# EAGLE board rev_p.2-v19 (EAGLE 9.7.0), part 1 of 3
REV: P
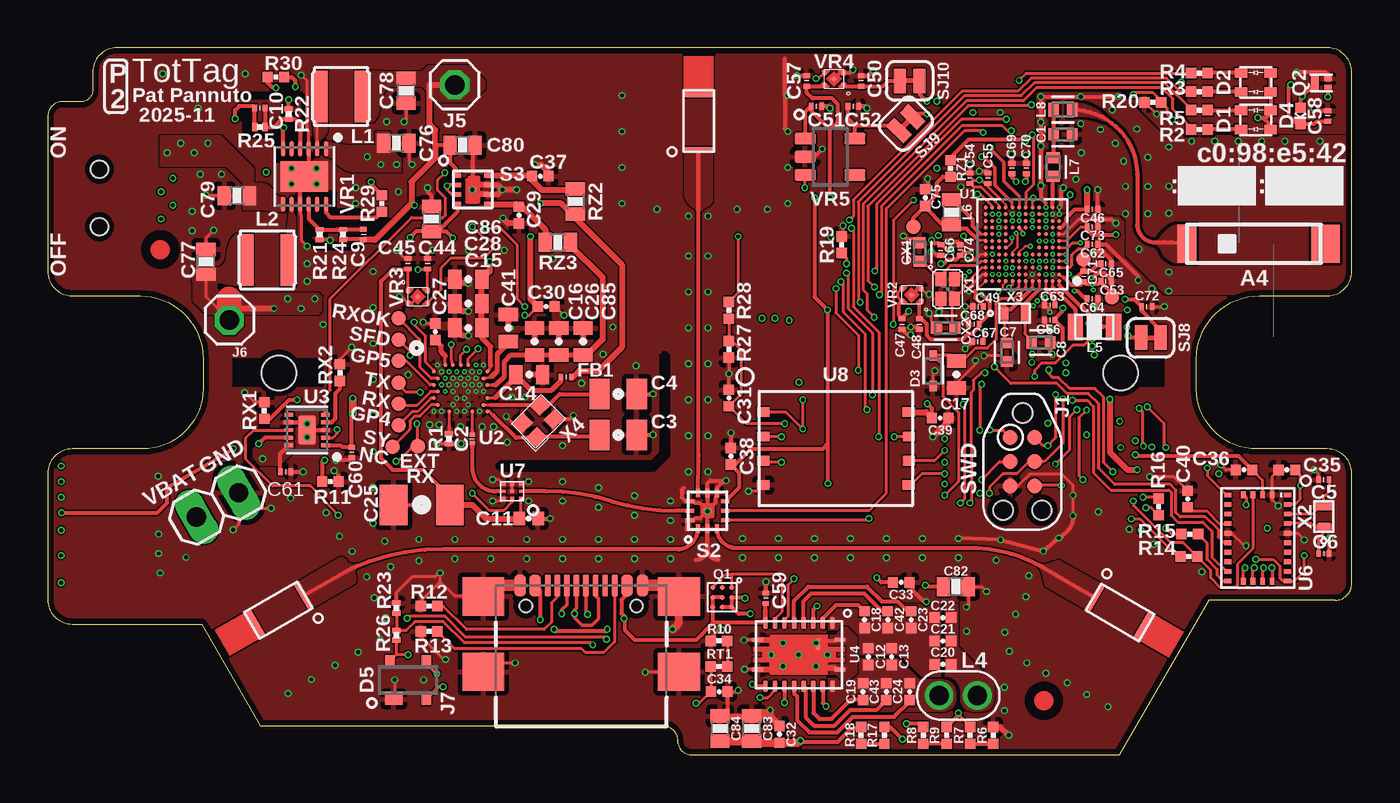
[diagram p0: board, top side]
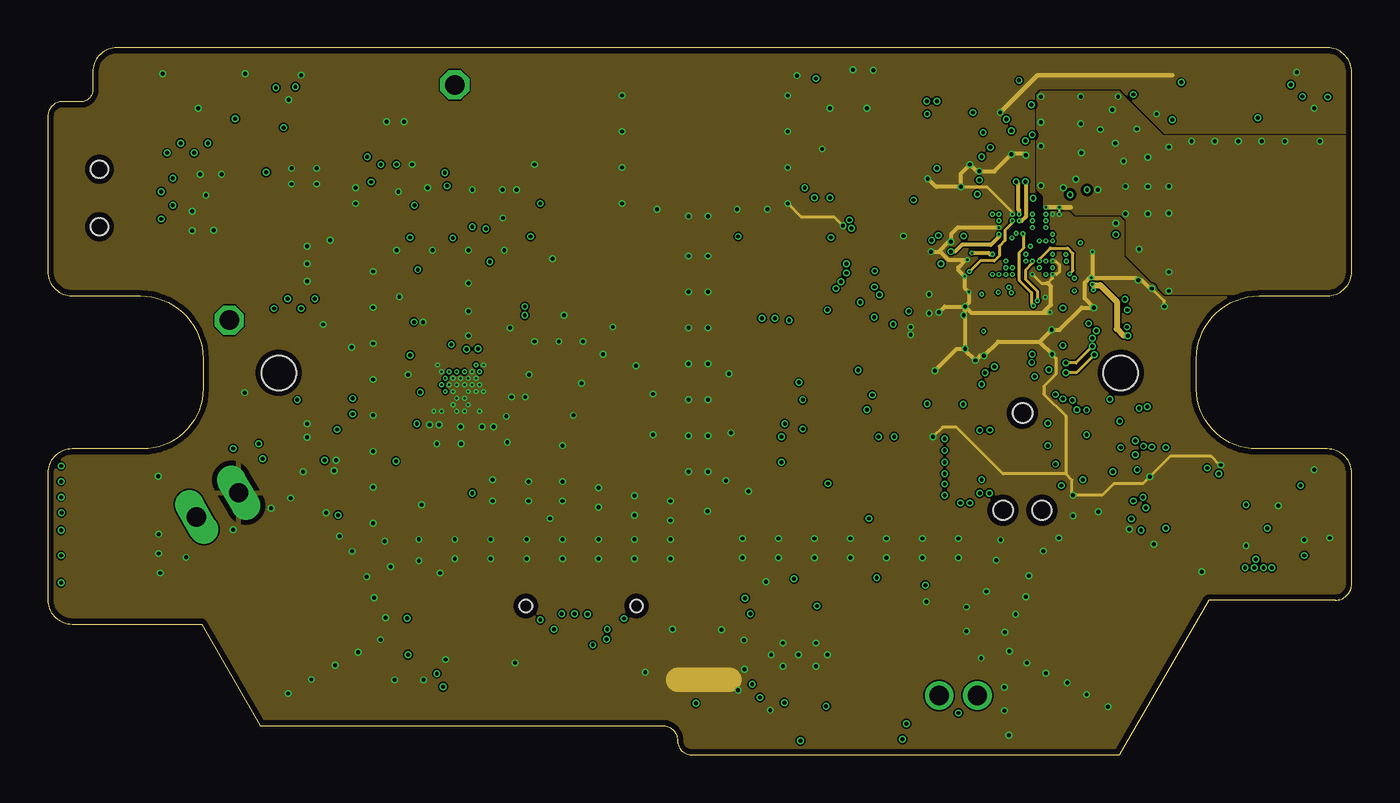
[diagram p1: board, inner layer Route2]
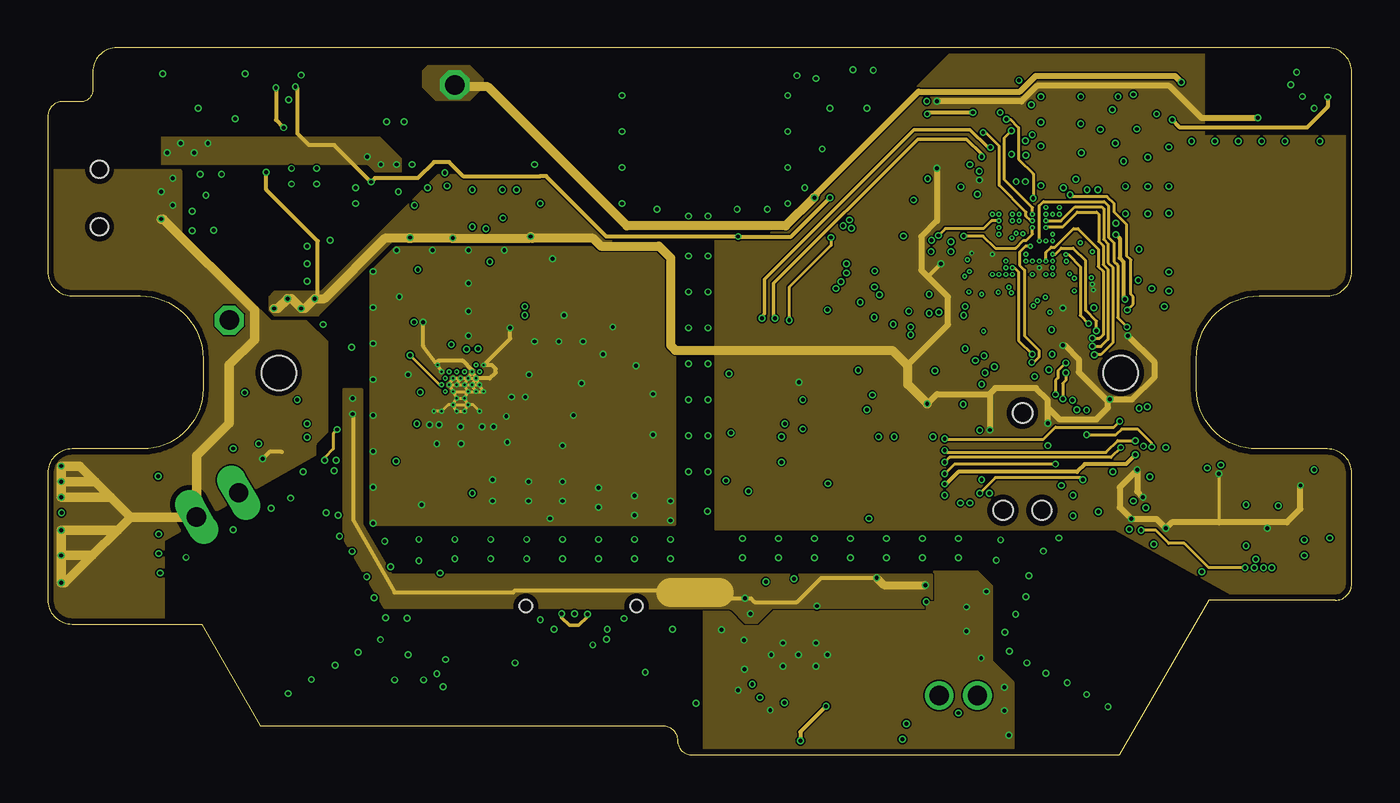
[diagram p2: board, inner layer Route15]
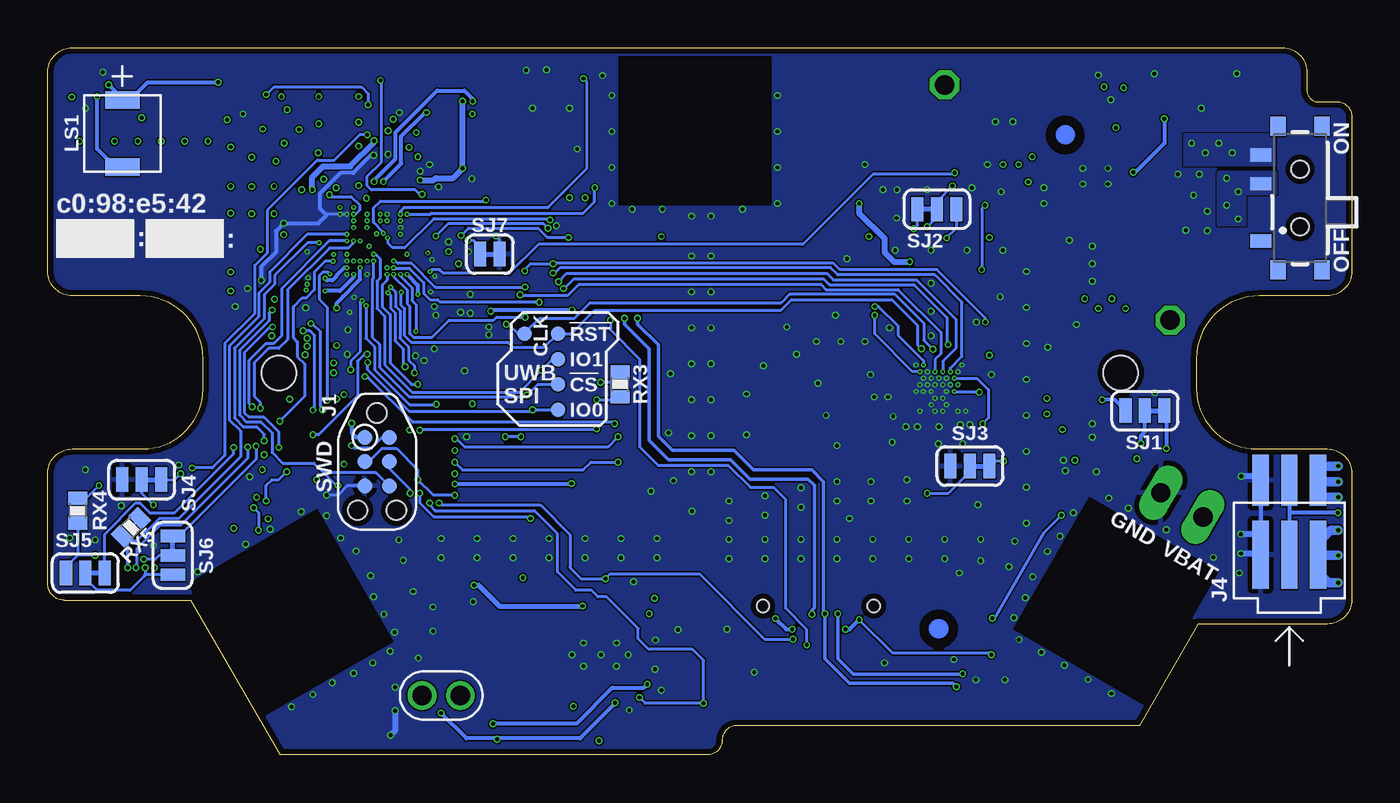
[diagram p3: board, bottom side, seen from below]

Size 68.14 x 36.93 mm. Coordinates in mm from the lower left corner, seen from the top.
Outline: 66.87,36.93 3.61,36.93 arc90 2.34,35.66 2.34,34.7 arc-90 1.76,34.12 0.76,34.12 arc90 0,33.36 0,25.25 arc90 1.27,23.98 4.83,23.98 arc-90 8.11,20.69 8.11,19.14 arc-90 4.95,15.98 1.27,15.98 arc90 0,14.71 0,8.1 arc90 1.27,6.83 8.03,6.83 11.11,1.52 32.14,1.52 arc-90 32.9,0.76 arc90 33.66,0 55.99,0 60.66,8.08 67.29,8.08 arc90 68.14,8.92 68.14,14.71 arc90 66.87,15.98 63.18,15.98 arc-90 60.02,19.14 60.02,20.69 arc-90 63.31,23.98 66.87,23.98 arc90 68.14,25.25 68.14,35.66 arc90 66.87,36.93
Copper layers (1+2*15+16): Top 0.035mm / dielectric 1.5mm / Route2 0.035mm / dielectric 0.15mm / Route15 0.035mm / dielectric 0.2mm / Bottom 0.035mm
Design rules "drc *": minimum track width 6mil, minimum drill 4mil, track to track 3mil, track to pad 3mil, pad to pad 4mil, via to via 3mil, smd to smd 4mil, copper to edge 12mil, drill to drill 6mil, minimum pad ring 8mil, minimum via ring 3mil, stop-mask expansion 1mil, vias tented up to drill 12mil, thermal gap 10mil
Net classes: 1 BLE_RF: width 0.22 mm, clearance 0.15 mm; 2 UWB_RF: width 0.22 mm, clearance 0.15 mm; 3 USB_PHY: width 0.152 mm, clearance 0.305 mm; 4 UWB_XTAL: width 0.22 mm, clearance 0.15 mm
Holes 1.8 mm at 12.07,19.95 56.07,19.95
tKeepout: area 18.1,9.6 to 32.3,11.7; area 34.3,9.6 to 48.8,11.7; area 33.1,12.4 to 35.1,27.8
tRestrict: area 9.7,19.3 to 14.4,20.7; area 53.8,19.3 to 58.3,20.7; area 13.4,26.4 to 16.5,29.4; area 10,31 to 13.5,34.6; area 21.2,16.9 to 21.3,17.4; area 21.9,16.9 to 22,17.4; area 23.5,14.9 to 32.5,21

## Footprints (pad centres in the part's own frame; a part is rotated, then mirrored left to right if it is on the bottom)
ACR0301U = smd 1.57 x 0.3: FEED 3.685,2.89; STRUCT-NC 3.685,5.79
AMCA72-2R470G-S1F-T = smd 2 x 1.5: NC 0,3.75 | smd 2 x 1: S1 0,-3.5
CAPC1005X60 = smd 0.56 x 0.629: 1 -0.485,0; 2 0.485,0
0201_CAP = smd 0.3 x 0.21: P$1 0,0.22; P$2 0,-0.22
SMD_2012M-0805US-C = smd 1.05 x 1.6: P$1 -0.975,0; P$2 0.975,0
0201_CAP' = smd 0.25 x 0.35: P$1 -0.275,0; P$2 0.275,0
SMD_1005M-0402US-C = smd 0.6 x 0.7: P$1 -0.5,0; P$2 0.5,0
0402_CAP = smd 0.536 x 0.546: 1 -0.433,0; 2 0.433,0
SMD_1608M-0603US-C = smd 0.7 x 1: P$1 -0.7,0; P$2 0.7,0
SMD_3216M-1206US-C = smd 1.45 x 2.1: P$1 -1.475,0; P$2 1.475,0
0603_CAP = smd 0.7 x 1: 1 -0.65,0; 2 0.65,0
LED-0606 = smd 0.65 x 0.5: A1 0.775,0.5; A2 0.775,-0.5; C1 -0.775,0.5; C2 -0.775,-0.5
SODFL1608X70 = smd 0.538 x 0.4: 1 -0.796,0; 2 0.796,0
0402_DIODE = smd 0.536 x 0.546: ANODE -0.433,0; CATHODE 0.433,0
SOT143B = smd 0.9 x 0.6: 1 -0.75,-1 | smd 0.5 x 0.6: 2 0.95,-1; 3 0.95,1; 4 -0.95,1
0201_FB = smd 0.25 x 0.35: P$1 -0.275,0; P$2 0.275,0
TC2030-IDC-NL-2SIDE = smd 0.787 x 0.787: 1 -1.27,-0.635; 2 -1.27,0.635; 3 0,-0.635; 4 0,0.635; 5 1.27,-0.635; 6 1.27,0.635 | smd 0.787 x 0.787 bottom: B1 -1.27,0.635; B2 -1.27,-0.635; B3 0,0.635; B4 0,-0.635; B5 1.27,0.635; B6 1.27,-0.635 | hole 1.016: -2.54,0; 2.54,1.016; 2.54,-1.016
1X02 = drill 1.016 long: 1 -1.27,0; 2 1.27,0
MOLEX-PICO-SPOX-3_SIDE = smd 3.55 x 0.85: 1 -1.725,1.5; 2 -1.725,0; 3 -1.725,-1.5 | smd 2.65 x 0.85: 1SUPP 2.175,1.5; 2SUPP 2.175,0; 3SUPP 2.175,-1.5
1X01 = drill 1.016 octagon: 1 0,0
GCT_USB4110-GF-A = smd 0.6 x 1.15: A1/B12 -3.2,1.075; A4/B9 -2.4,1.075; B1/A12 3.2,1.075; B4/A9 2.4,1.075 | smd 0.3 x 1.15: A5 -1.25,1.075; A6 -0.25,1.075; A7 0.25,1.075; A8 1.25,1.075; B5 1.75,1.075; B6 0.75,1.075; B7 -0.75,1.075; B8 -1.75,1.075 | smd 2.18 x 2: S1 -5.11,0.5; S2 5.11,0.5; S3 -5.11,-3.43; S4 5.11,-3.43 | hole 0.65: -2.89,0; 2.89,0
NRX3015 = smd 0.8 x 2.7: P$1 -1.1,0; P$2 1.1,0
WURTH_COIL_760308103204 = drill 1: P$1 0,1; P$2 0,-1
0805_CAP = smd 0.8 x 1.4: P$1 1,0; P$2 -1,0
INDC1006X60N = smd 0.56 x 0.729: 1 -0.485,0; 2 0.485,0
SMT-0440-T-2-R = smd 0.9 x 1.8: + 1.75,0; - -1.75,0
DSBGA = smd 0.25 x 0.25: A1 -0.5,0.5; A2 0,0.5; A3 0.5,0.5; B1 -0.5,0; B2 0,0; B3 0.5,0; C1 -0.5,-0.5; C2 0,-0.5; C3 0.5,-0.5
XFDFN-3 = smd 0.4 x 0.7: D 0.35,0 | smd 0.4 x 0.25: G -0.35,0.215; S -0.35,-0.215
0201_RES = smd 0.28 x 0.43: 1 -0.255,0; 2 0.255,0
0402_RES = smd 0.536 x 0.546: 1 -0.433,0; 2 0.433,0
0603-RES = smd 0.7 x 1: 1 -0.65,0; 2 0.65,0
450404015514 = smd 0.7 x 1.1: 1 2.25,-2.05; 2 -0.75,-2.05; 3 -2.25,-2.05 | smd 1 x 0.8: Z1 -3.75,1.15; Z2 3.75,1.15; Z3 3.75,-1.15; Z4 -3.75,-1.15 | hole 0.9: -1.5,0; 1.5,0
SKY13373 = smd 0.44 x 0.2: 1 -0.93,0.5; 2 -0.93,0; 3 -0.93,-0.5; 7 0.93,-0.5; 8 0.93,0; 9 0.93,0.5 | smd 0.2 x 0.44: 4 -0.5,-0.93; 5 0,-0.93; 6 0.5,-0.93; 10 0.5,0.93; 11 0,0.93; 12 -0.5,0.93; PAD 0,0
TDFN2X2X0P6-8 = smd 0.4 x 0.24: 1 -0.8,0.75; 2 -0.8,0.25; 3 -0.8,-0.25; 4 -0.8,-0.75; 5 0.8,-0.75; 6 0.8,-0.25; 7 0.8,0.25; 8 0.8,0.75; PAD 0,0
SMT-JUMPER_3_1-NC_TRACE_SILK = smd 0.635 x 1.27: 1 -1.016,0; 2 0,0; 3 1.016,0
SMT-JUMPER_2_NC_TRACE_SILK = smd 0.635 x 1.27: 1 -0.508,0; 2 0.508,0
PAD.03X.03 = smd 0.762 x 0.762: P$1 0,0
APOLLO4_BLUE_SOC_BGA = smd 0.2 x 0.2: A1 -1.925,1.925; A2 -1.575,1.925; A3 -1.225,1.925; A4 -0.875,1.925; A5 -0.525,1.925; A6 -0.175,1.925; A7 0.175,1.925; A8 0.525,1.925; A9 0.875,1.925; A10 1.225,1.925; A11 1.575,1.925; A12 1.925,1.925; B1 -1.925,1.575; B2 -1.575,1.575; B3 -1.225,1.575; B4 -0.875,1.575; B5 -0.525,1.575; B6 -0.175,1.575; B7 0.175,1.575; B8 0.525,1.575; B9 0.875,1.575; B10 1.225,1.575; B11 1.575,1.575; B12 1.925,1.575; C1 -1.925,1.225; C2 -1.575,1.225; C3 -1.225,1.225; C4 -0.875,1.225; C5 -0.525,1.225; C6 -0.175,1.225; C7 0.175,1.225; C8 0.525,1.225; C9 0.875,1.225; C10 1.225,1.225; C11 1.575,1.225; C12 1.925,1.225; D1 -1.925,0.875; D2 -1.575,0.875; D3 -1.225,0.875; D4 -0.875,0.875; D5 -0.525,0.875; D6 -0.175,0.875; D7 0.175,0.875; D8 0.525,0.875; D9 0.875,0.875; D10 1.225,0.875; D11 1.575,0.875; D12 1.925,0.875; E1 -1.925,0.525; E2 -1.575,0.525; E3 -1.225,0.525; E4 -0.875,0.525; E5 -0.525,0.525; E6 -0.175,0.525; E7 0.175,0.525; E8 0.525,0.525; E9 0.875,0.525; E10 1.225,0.525; E11 1.575,0.525; E12 1.925,0.525; F1 -1.925,0.175; F2 -1.575,0.175; F3 -1.225,0.175; F4 -0.875,0.175; F9 0.875,0.175; F10 1.225,0.175; F11 1.575,0.175; F12 1.925,0.175; G1 -1.925,-0.175; G2 -1.575,-0.175; G3 -1.225,-0.175; G4 -0.875,-0.175; G9 0.875,-0.175; G10 1.225,-0.175; G11 1.575,-0.175; G12 1.925,-0.175; H1 -1.925,-0.525; H2 -1.575,-0.525; H3 -1.225,-0.525; H4 -0.875,-0.525; H9 0.875,-0.525; H10 1.225,-0.525; H11 1.575,-0.525; H12 1.925,-0.525; J1 -1.925,-0.875; J2 -1.575,-0.875; J3 -1.225,-0.875; J4 -0.875,-0.875; J5 -0.525,-0.875; J6 -0.175,-0.875; J7 0.175,-0.875; J8 0.525,-0.875; J9 0.875,-0.875; J10 1.225,-0.875; J11 1.575,-0.875; J12 1.925,-0.875; K1 -1.925,-1.225; K2 -1.575,-1.225; K3 -1.225,-1.225; K4 -0.875,-1.225; K5 -0.525,-1.225; K6 -0.175,-1.225; K7 0.175,-1.225; K8 0.525,-1.225; K9 0.875,-1.225; K10 1.225,-1.225; K11 1.575,-1.225; K12 1.925,-1.225; L1 -1.925,-1.575; L2 -1.575,-1.575; L4 -0.875,-1.575; L5 -0.525,-1.575; L6 -0.175,-1.575; L7 0.175,-1.575; L8 0.525,-1.575; L9 0.875,-1.575; L10 1.225,-1.575; L11 1.575,-1.575; L12 1.925,-1.575; M1 -1.925,-1.925; M2 -1.575,-1.925; M3 -1.225,-1.925; M4 -0.875,-1.925; M5 -0.525,-1.925; M6 -0.175,-1.925; M7 0.175,-1.925; M8 0.525,-1.925; M9 0.875,-1.925; M10 1.225,-1.925; M11 1.575,-1.925; M12 1.925,-1.925
WLCSP52 = smd 0.216 x 0.216: A2 -1.2,1.211; A4 -0.8,1.211; A6 -0.4,1.211; A8 0,1.211; A10 0.4,1.211; A12 0.8,1.211; A14 1.2,1.211; B1 -1.4,0.865; B3 -1,0.865; B5 -0.6,0.865; B7 -0.2,0.865; B9 0.2,0.865; B11 0.6,0.865; B13 1,0.865; B15 1.4,0.865; C2 -1.2,0.519; C4 -0.8,0.519; C6 -0.4,0.519; C8 0,0.519; C10 0.4,0.519; C12 0.8,0.519; C14 1.2,0.519; D1 -1.4,0.173; D3 -1,0.173; D5 -0.6,0.173; D7 -0.2,0.173; D9 0.2,0.173; D11 0.6,0.173; D13 1,0.173; D15 1.4,0.173; E2 -1.2,-0.173; E4 -0.8,-0.173; E6 -0.4,-0.173; E10 0.4,-0.173; E12 0.8,-0.173; E14 1.2,-0.173; F1 -1.4,-0.519; F7 -0.2,-0.519; F9 0.2,-0.519; F15 1.4,-0.519; G2 -1.2,-0.865; G6 -0.4,-0.865; G10 0.4,-0.865; G14 1.2,-0.865; H1 -1.4,-1.211; H3 -1,-1.211; H5 -0.6,-1.211; H7 -0.2,-1.211; H9 0.2,-1.211; H11 0.6,-1.211; H13 1,-1.211; H15 1.4,-1.211
DSQ0010A = smd 0.5 x 0.2: 1 -0.95,0.8; 2 -0.95,0.4; 3 -0.95,0; 4 -0.95,-0.4; 5 -0.95,-0.8; 6 0.95,-0.8; 7 0.95,-0.4; 8 0.95,0; 9 0.95,0.4; 10 0.95,0.8 | smd 0.9 x 1.5: PAD 0,0
RHL0020A = smd 0.24 x 0.6: 1 -0.775,2.15; 10 -0.775,-2.15; 11 0.775,-2.15; 20 0.775,2.15 | smd 0.6 x 0.24: 2 -1.65,1.75; 3 -1.65,1.25; 4 -1.65,0.75; 5 -1.65,0.25; 6 -1.65,-0.25; 7 -1.65,-0.75; 8 -1.65,-1.25; 9 -1.65,-1.75; 12 1.65,-1.75; 13 1.65,-1.25; 14 1.65,-0.75; 15 1.65,-0.25; 16 1.65,0.25; 17 1.65,0.75; 18 1.65,1.25; 19 1.65,1.75; PAD -0.55,1
LGA28R0P510X4_5P2X3P8X1 = smd 0.25 x 0.375: 1 -2.25,1.562; 6 -2.25,-1.562; 7 -1.75,-1.562; 8 -1.25,-1.562; 9 -0.75,-1.562; 10 -0.25,-1.562; 11 0.25,-1.562; 12 0.75,-1.562; 13 1.25,-1.562; 14 1.75,-1.562; 15 2.25,-1.562; 20 2.25,1.562; 21 1.75,1.562; 22 1.25,1.562; 23 0.75,1.562; 24 0.25,1.562; 25 -0.25,1.562; 26 -0.75,1.562; 27 -1.25,1.562; 28 -1.75,1.562 | smd 0.375 x 0.25: 2 -2.263,0.75; 3 -2.263,0.25; 4 -2.263,-0.25; 5 -2.263,-0.75; 16 2.263,-0.75; 17 2.263,-0.25; 18 2.263,0.25; 19 2.263,0.75
QM14068 = smd 0.2 x 0.17: 1 -0.45,0.365; 2 -0.45,0; 3 -0.45,-0.365; 4 0,-0.365; 5 0.45,-0.365; 6 0.45,0; 7 0.45,0.365; 8 0,0.365; 9 0,0
AS5FXXXXXXXX-XXLXN = smd 0.65 x 0.5: 1 -3.8,1.9; 2 -3.8,0.63; 3 -3.8,-0.64; 4 -3.8,-1.9; 5 3.8,-1.9; 6 3.82,-0.64; 7 3.82,0.63; 8 3.8,1.9
SON45P300X300X80-13T160X250N = smd 0.813 x 0.224: 1 -1.445,1.125; 2 -1.445,0.675; 3 -1.445,0.225; 4 -1.445,-0.225; 5 -1.445,-0.675; 6 -1.445,-1.125; 7 1.445,-1.125; 8 1.445,-0.675; 9 1.445,-0.225; 10 1.445,0.225; 11 1.445,0.675; 12 1.445,1.125 | smd 1.6 x 2.5: 13 0,0
4-XDFN-EP = smd 0.21 x 0.21: 1 -0.505,0.325; 2 -0.505,-0.325; 3 0.505,-0.325; 4 0.505,0.325 | smd 0.2 x 0.2 rotated 45: PAD 0,0
DBV0005A--SOT23-5-VARIANT = smd 1.1 x 0.6: 1 -1.3,0.95; 2 -1.3,0; 3 -1.3,-0.95; 4 1.3,-0.95; 5 1.3,0.95
ABM12W = smd 0.73 x 0.58: 1 -0.5,-0.35; 2 0.5,-0.35; 3 0.5,0.35; 4 -0.5,0.35
TXC-9HT12 = smd 0.4 x 0.6: 1 -0.53,0 | smd 0.4 x 0.86: 2 0.53,0
TXC-8Y = smd 0.8 x 0.7: 1 -0.65,-0.5; 2 0.65,-0.5; 3 0.65,0.5; 4 -0.65,0.5

## Placement (x,y rotation side)
A1  ACR0301U  [ACR0301U]  30.32,28.71 0 top
A2  ACR0301U  [ACR0301U]  54.07,12.84 240 top
A3  ACR0301U  [ACR0301U]  17.71,6.55 120 top
A4  AMCA72-2R47G-S1F-T  [AMCA72-2R470G-S1F-T]  63.02,26.7 270 top
C1  1.5pF  [CAPC1005X60]  53.04,32.41 0 top
C2  2pF  [0201_CAP]  22.18,16.51 0 top
C3  3.3pF  [SMD_2012M-0805US-C]  29.8,16.71 0 top
C4  3.3pF  [SMD_2012M-0805US-C]  29.8,18.85 0 top
C5  4pF  [0201_CAP']  66.68,14.38 0 top
C6  4pF  [0201_CAP']  66.68,10.52 180 top
C7  6pF  [CAPC1005X60]  50.12,21.03 270 top
C8  6pF  [CAPC1005X60]  51.9,21.54 0 top
C9  22pF  [0201_CAP']  16.49,27.18 90 top
C10  22pF  [0201_CAP']  11.08,33.78 180 top
C11  100pF  [SMD_1005M-0402US-C]  25.13,12.34 0 top
C12  470pF  [0402_CAP]  42.88,5.13 270 top
C13  470pF  [0402_CAP]  44.1,5.13 270 top
C14  4.7nF  [SMD_1608M-0603US-C]  25.15,19.86 0 top
C15  4.7nF  [SMD_1608M-0603US-C]  21.98,22.3 180 top
C16  4.7nF  [SMD_1608M-0603US-C]  25.43,21.59 270 top
C17  4.7nF  [SMD_1608M-0603US-C]  47.48,19.86 90 top
C18  10nF  [0402_CAP]  42.68,7.06 270 top
C19  10nF  [0402_CAP]  42.6,3.3 90 top
C20  22nF  [0402_CAP]  46.77,4.72 0 top
C21  22nF  [0402_CAP]  46.77,5.94 0 top
C22  22nF  [0402_CAP]  46.77,7.16 0 top
C23  22nF  [0402_CAP]  45.12,7.06 270 top
C24  22nF  [0402_CAP]  45.04,3.3 90 top
C25  0.1uF  [SMD_3216M-1206US-C]  19.54,13.06 180 top
C26  0.1uF  [SMD_1608M-0603US-C]  26.7,21.59 270 top
C27  0.1uF  [0402_CAP]  20.25,22.1 90 top
C28  0.1uF  [SMD_1608M-0603US-C]  21.98,23.57 180 top
C29  0.1uF  [0402_CAP]  24.62,28.19 270 top
C30  0.1uF  [0402_CAP]  26.04,23.42 0 top
C31  0.1uF  [0402_CAP]  35.59,18.64 90 top
C32  0.1uF  [0402_CAP]  38.23,1.07 90 top
C33  0.1uF  [0402_CAP]  44.59,9.01 0 top
C34  0.1uF  [0402_CAP]  35.08,3.3 0 top
C35  0.1uF  [0402_CAP]  64.75,14.88 180 top
C36  0.1uF  [0402_CAP]  62.52,14.88 180 top
C37  0.1uF  [0402_CAP]  25.74,30.23 0 top
C38  0.1uF  [0402_CAP]  35.69,15.6 90 top
C39  0.1uF  [0402_CAP]  46.64,17.59 0 top
C40  0.1uF  [0402_CAP]  59.57,13.36 90 top
C41  0.22uF  [SMD_1608M-0603US-C]  24.06,22.3 270 top
C42  0.47uF  [0402_CAP]  43.9,7.06 270 top
C43  0.47uF  [0402_CAP]  43.82,3.3 90 top
C44  1uF  [0201_CAP']  19.84,25.65 90 top
C45  1uF  [0201_CAP']  18.83,25.65 90 top
C46  1uF  [0201_CAP']  54.59,28.5 0 top
C47  1uF  [0201_CAP']  44.63,22.5 270 top
C48  1uF  [0201_CAP']  45.55,22.5 270 top
C49  1uF  [0201_CAP']  48.62,23.42 0 top
C50  1uF  [0201_CAP']  42.5,35.2 90 top
C51  1uF  [0201_CAP']  40.16,33.88 0 top
C52  1uF  [0201_CAP']  42.09,33.88 0 top
C53  1uF  [0201_CAP']  55.3,24.74 0 top
C54  1uF  [0201_CAP']  48.19,30.12 90 top
C55  1uF  [0201_CAP']  49.13,30.12 90 top
C56  1uF  [0201_CAP']  52.36,22.71 180 top
C57  1uF  [0201_CAP']  39.66,35.2 90 top
C58  1uF  [0201_CAP']  66.88,33.38 90 top
C59  1uF  [0201_CAP']  37.52,8.18 90 top
C60  1uF  [0201_CAP']  15.88,15.8 90 top
C61  1uF  [0201_CAP']  12.43,14.78 180 top
C62  2.2uF  [0201_CAP']  54.59,26.67 0 top
C63  2.2uF  [0201_CAP']  52.36,23.49 180 top
C64  2.2uF  [0201_CAP']  54.59,23.83 0 top
C65  2.2uF  [0201_CAP']  55.3,25.65 0 top
C66  2.2uF  [0201_CAP']  46.67,26.37 270 top
C67  2.2uF  [0201_CAP']  48.6,21.59 0 top
C68  2.2uF  [0201_CAP']  48.39,22.5 180 top
C69  2.2uF  [0201_CAP']  50.37,30.63 90 top
C70  2.2uF  [0201_CAP']  51.14,30.63 90 top
C71  2.2uF  [0201_CAP']  54.13,24.99 270 top
C72  2.2uF  [0201_CAP']  57.44,23.42 0 top
C73  2.2uF  [0201_CAP']  54.59,27.58 0 top
C74  2.2uF  [0201_CAP']  47.68,26.37 90 top
C75  4.7uF  [0402_CAP]  45.85,29.11 90 top
C76  4.7uF  [0603_CAP]  18.22,31.95 180 top
C77  4.7uF  [0603_CAP]  8.26,25.76 90 top
C78  4.7uF  [0603_CAP]  18.73,34.7 90 top
C79  4.7uF  [0603_CAP]  9.89,29.21 180 top
C80  4.7uF  [0603_CAP]  21.67,31.85 0 top
C81  4.7uF  [0603_CAP]  20.05,27.99 270 top
C82  10uF  [0603_CAP]  47.45,8.79 0 top
C83  10uF  [0603_CAP]  36.79,1.37 90 top
C84  10uF  [0603_CAP]  35.13,1.37 90 top
C85  10uF  [SMD_1608M-0603US-C]  27.97,21.59 270 top
C86  10uF  [SMD_1608M-0603US-C]  21.98,24.84 180 top
CX1  DNP  [CAPC1005X60]  45.55,26.26 90 top
CX2  DNP  [CAPC1005X60]  46.92,22.3 180 top
D1  BICOLOR-SMD  [LED-0606]  63.13,33.17 0 top
D2  BICOLOR-SMD  [LED-0606]  63.13,35.13 0 top
D3  ZENER  [SODFL1608X70]  46.26,20.07 270 top
D4  DIODE0402  [0402_DIODE]  65.46,33.38 270 top
D5  DIODE_TVS_ARRAY-2  [SOT143B]  18.83,3.91 0 top
FB1  BLM03PG330SN1D  [0201_FB]  27.08,19.74 180 top
FD1  FIDUCIAL  [FIDUCIAL_1MM-CU_2MM-MASK]  5.88,26.39 0 top
FD2  FIDUCIAL  [FIDUCIAL_1MM-CU_2MM-MASK]  52.05,2.82 0 top
FD3  FIDUCIAL  [FIDUCIAL_1MM-CU_2MM-MASK]  14.97,32.39 0 bottom
FD4  FIDUCIAL  [FIDUCIAL_1MM-CU_2MM-MASK]  21.58,6.58 0 bottom
J1  TC2030-JLINK-NL-2SIDE  [TC2030-IDC-NL-2SIDE]  50.93,15.32 270 top
J3  [1X02]  8.87,13.06 30 top
J4  MOLEX-PICO-SPOX-3SIDE  [MOLEX-PICO-SPOX-3_SIDE]  3.26,12.17 90 bottom
J5  [1X01]  21.27,35 180 top
J6  [1X01]  9.48,22.71 0 top
J7  USB4110-GF-A  [GCT_USB4110-GF-A]  27.87,7.77 0 top
L1  10uH  [NRX3015]  15.32,34.39 0 top
L2  10uH  [NRX3015]  11.46,25.86 0 top
L4  WURTH_COIL_760308103204  [WURTH_COIL_760308103204]  47.58,3.1 270 top
L5  2.2µH  [0805_CAP]  54.69,22.35 0 top
L6  1.0µH  [0603_CAP]  47.23,28.35 270 top
L7  2.0nH  [INDC1006X60N]  52.53,30.71 90 top
L8  2.2nH  [INDC1006X60N]  53.04,33.71 0 top
LS1  PUI_SMT-0440-T-2-R  [SMT-0440-T-2-R]  64.24,32.46 90 bottom
Q1  CSD75207W15  [DSBGA]  35.24,8.23 270 top
Q2  MOSFET-NCHANNELXFDN-3  [XFDFN-3]  66.55,35.1 180 top
R1  49.9-1%  [0201_RES]  20.96,16.51 270 top
R2  5.1  [0402_RES]  60.18,32.66 180 top
R3  5.1  [0402_RES]  60.18,34.65 180 top
R4  15  [0402_RES]  60.18,35.61 180 top
R5  15  [0402_RES]  60.18,33.68 180 top
R6  97.6  [0402_RES]  49.41,1.02 90 top
R7  97.6  [0402_RES]  48.19,1.02 270 top
R8  162  [0402_RES]  45.75,1.02 270 top
R9  162  [0402_RES]  46.97,1.02 90 top
R10  2.2k  [0402_RES]  35.08,5.95 0 top
R11  2.2k  [0402_RES]  14.76,14.27 180 top
R12  5.1k  [0402_RES]  19.92,7.77 180 top
R13  5.1k  [0402_RES]  19.92,6.45 180 top
R14  10k  [0402_RES]  59.62,10.36 180 top
R15  10k  [0402_RES]  59.67,11.53 180 top
R16  10k  [0402_RES]  58.05,12.95 90 top
R17  10k  [0402_RES]  43.72,1.02 90 top
R18  10k  [0402_RES]  42.5,1.02 270 top
R19  100k  [0402_RES]  41.48,26.64 270 top
R20  100k  [0402_RES]  57.74,34.09 180 top
R21  261k  [0201_RES]  14.21,27.18 90 top
R22  402k  [0201_RES]  12.58,33.48 270 top
R23  402k  [0201_RES]  18.22,7.67 270 top
R24  845k  [0201_RES]  15.42,27.18 270 top
R25  845k  [0201_RES]  11.08,32.79 0 top
R26  845k  [0201_RES]  18.22,6.25 270 top
R27  1.87M  [0402_RES]  35.59,21.18 90 top
R28  5.1M  [0402_RES]  35.59,23.22 90 top
R29  5.1M  [0402_RES]  17.46,28.8 270 top
R30  5.1M  [0402_RES]  11.92,35.41 180 top
RT1  10k@25C  [0402_RES]  35.08,4.62 180 top
RX1  DNP  [0402_RES]  11.31,17.98 270 top
RX2  DNP  [0402_RES]  15.27,19.96 270 top
RX3  DNP  [0603-RES]  38.23,19.35 90 bottom
RX4  DNP  [0603-RES]  66.58,12.75 270 bottom
RX5  DNP  [0603-RES]  63.79,11.89 225 bottom
RZ1  0  [0402_RES]  47.17,30.63 90 top
RZ2  0  [0603-RES]  27.57,28.91 270 top
RZ3  0  [0603-RES]  26.65,26.77 0 top
S1  [450404015514]  2.7,29.08 270 bottom
S2  SKY13373  [SKY13373]  34.47,12.75 90 top
S3  SIP3241XSIP32414  [TDFN2X2X0P6-8]  22.21,29.52 0 top
SJ1  JUMPER-SMT_3_1-NC_TRACE_SILK  [SMT-JUMPER_3_1-NC_TRACE_SILK]  10.8,17.98 0 bottom
SJ2  JUMPER-SMT_3_1-NC_TRACE_SILK  [SMT-JUMPER_3_1-NC_TRACE_SILK]  21.67,28.5 180 bottom
SJ3  JUMPER-SMT_3_1-NC_TRACE_SILK  [SMT-JUMPER_3_1-NC_TRACE_SILK]  19.95,15.09 0 bottom
SJ4  JUMPER-SMT_3_1-NC_TRACE_SILK  [SMT-JUMPER_3_1-NC_TRACE_SILK]  63.23,14.38 0 bottom
SJ5  JUMPER-SMT_3_1-NC_TRACE_SILK  [SMT-JUMPER_3_1-NC_TRACE_SILK]  66.17,9.5 0 bottom
SJ6  JUMPER-SMT_3_1-NC_TRACE_SILK  [SMT-JUMPER_3_1-NC_TRACE_SILK]  61.6,10.41 90 bottom
SJ7  JUMPER-SMT_2_NC_TRACE_SILK  [SMT-JUMPER_2_NC_TRACE_SILK]  45.04,26.16 0 bottom
SJ8  JUMPER-SMT_2_NC_TRACE_SILK  [SMT-JUMPER_2_NC_TRACE_SILK]  57.64,21.79 0 top
SJ9  JUMPER-SMT_2_NC_TRACE_SILK  [SMT-JUMPER_2_NC_TRACE_SILK]  44.84,32.97 225 top
SJ10  JUMPER-SMT_2_NC_TRACE_SILK  [SMT-JUMPER_2_NC_TRACE_SILK]  45.04,35.2 180 top
TP0  TEST-POINT  [PAD.03X.03]  18.32,22.81 0 top
TP1  TEST-POINT  [PAD.03X.03]  18.32,21.69 0 top
TP2  TEST-POINT  [PAD.03X.03]  18.32,19.43 0 top
TP3  TEST-POINT  [PAD.03X.03]  18.32,18.34 0 top
TP4  TEST-POINT  [PAD.03X.03]  18.32,17.22 0 top
TP5  TEST-POINT  [PAD.03X.03]  18.32,20.57 0 top
TP6  TEST-POINT  [PAD.03X.03]  19.34,16.13 0 top
TP7  TEST-POINT  [PAD.03X.03]  18.02,16.1 0 top
TP8  TEST-POINT  [PAD.03X.03]  45.24,27.58 180 top
TP9  TEST-POINT  [PAD.03X.03]  55.6,23.89 180 top
TP10  TEST-POINT  [PAD.03X.03]  54.11,25.88 180 top
TP11  TEST-POINT  [PAD.03X.03]  43.21,22 0 bottom
TP12  TEST-POINT  [PAD.03X.03]  41.48,19.35 0 bottom
TP13  TEST-POINT  [PAD.03X.03]  41.48,18.03 0 bottom
TP14  TEST-POINT  [PAD.03X.03]  41.48,20.68 0 bottom
TP15  TEST-POINT  [PAD.03X.03]  41.48,22 0 bottom
U1  APOLLO4_BLUE_PLUS_SOC_KBR  [APOLLO4_BLUE_SOC_BGA]  50.93,26.67 180 top
U2  DW3110  [WLCSP52]  21.57,19.15 0 top
U3  BQ24040  [DSQ0010A]  13.54,16.97 180 top
U4  BQ51013B  [RHL0020A]  39.25,5.23 270 top
U6  BNO086  [LGA28R0P510X4_5P2X3P8X1]  63.23,11.33 270 top
U7  QM14068  [QM14068]  24.26,13.77 180 top
U8  AS5FXXX04SND  [AS5FXXXXXXXX-XXLXN]  41.18,16 0 top
VR1  RT8020RT8020GQW  [SON45P300X300X80-13T160X250N]  13.41,30.21 270 top
VR2  TPS7A0218PDQNR  [4-XDFN-EP]  45.14,24.03 180 top
VR3  TPS7A0218PDQNR  [4-XDFN-EP]  19.34,23.93 0 top
VR4  TPS7A0233PDQNR  [4-XDFN-EP]  41.08,35.31 180 top
VR5  TPS7A0309PDBVR  [DBV0005A--SOT23-5-VARIANT]  40.88,31.24 0 top
X1  ABM12W  [ABM12W]  47.02,24.33 270 top
X2  TXC-9HT12  [TXC-9HT12]  66.68,12.45 90 top
X3  TXC-9HT12  [TXC-9HT12]  50.53,23.06 0 top
X4  [TXC-8Y]  25.64,17.42 45 top

## Library data of the parts
A1-A3 = antennas; MANUFACTURER: Abracon; MPN: ACR0301U
A4 = antennas; DESCRIPTION: RF ANT 2.4GHZ CHIP SOLDER SMD; DIGIKEY: 535-14108-1-ND; MPN: AMCA72-2R470G-S1F-T4
C1 = Capacitor; CATEGORY: Capacitor; DESCRIPTION: CAP CER 1.5PF 50V C0G/NP0 0402; MANUFACTURER: KEMET; MPN: C0402C159C5GACTU; TEMPCOEFF: NP0; TOLERANCE: +/- 0.25pF
C2 = passives; MPN: CBR02C209A5GAC
C3 C4 = worthington; EIA: C0G; MANUFACTURER: KYOCERA AVX; MPN: 600F3R3BT250XT
C5 C6 = passives; MANUFACTURER: Murata; MPN: GRM0335C1H4R0BA01D
C7 C8 = Capacitor; CATEGORY: Capacitor; MANUFACTURER: Murata; MPN: GCM1555C1H6R0BA16D
C9 C10 = passives; MPN: GRM0335C1H220FA01D
C11 = worthington; EIA: C0G; MPN: C0402C101J3GACTU
C12 C13 = passives; DESCRIPTION: CAP CER 470PF 50V C0G/NP0 0402; DIGIKEY: 490-6242-1-ND; MANUFACTURER: Murata; MPN: GRM1555C1H471JA01J
C14-C17 = worthington; EIA: C0G; FEATURES: Low ESL; MANUFACTURER: KEMET; MPN: C0603C472J5GACTU
C18 C19 = passives; DIGIKEY: 490-6351-2-ND; MPN: GRM155R71H103KA88J
C20-C22 = passives; DIGIKEY: 490-10699-2-ND; MPN: GRM155R71E223JA61D
C23 C24 = passives; DIGIKEY: 311-3823-1-ND; MPN: CC0402ZRY5V8BB223
C25 = worthington; EIA: C0G; MPN: GRM31C5C1H104JA01L
C26 C28 = worthington; FEATURES: Low ESL; MPN: C1608X7R1H104K080AA
C27 C29 C30 C35-C40 = passives; MPN: CL05A104KP5NNNC
C31-C34 = passives; DIGIKEY: 490-6328-1-ND; MPN: GRM155R71C104KA88J
C41 = worthington; FEATURES: Low ESL; MPN: C1608X7R1H224K080AB
C42 C43 = passives; MPN: C1005X5R1E474K050BB
C44-C48 C50-C61 = passives; MANUFACTURER: Murata; MPN: GRM033R61A105ME44D
C49 = passives; MANUFACTURER: MURATA; MPN: GRM033R61A105ME44D
C62-C74 = passives; MANUFACTURER: Murata; MPN: GRM033R61A225KE47D
C75 = passives; MPN: CL05A475MP5NRNC
C76-C81 = passives; APPLICATION: SMPS Filter; MPN: C1608X7S1A475K080AC
C82-C84 = passives; DIGIKEY: 1253-CM105X5R106M25ATCT-ND; MPN: CM105X5R106M25AT
C85 C86 = worthington; MPN: CM105X5R106M25AT
CX1 CX2 = Capacitor; CATEGORY: Capacitor
D1 = leds; MPN: MCL0606FRD1GR1T
D2 = leds; MPN: MCL0606FYW1RD1T
D3 = Diode; CATEGORY: Diode; DESCRIPTION: DIODE TVS 5.5V STANDOFF 8V BREAKDOWN SC79; MANUFACTURER: NXP SEMICONDUCTOR; MPN: PESD5V0X1UB,135; SUB-CATEGORY: Zener
D4 = passives; DIGIKEY: 641-2087-1-ND; MPN: CDSQR400B-HF
D5 = passives; MPN: PRTR5V0U2X,215
FB1 = passives; MANUFACTURER: Murata; MPN: BLM03PG330SN1D
FD1-FD4 = Quorvo
J1 = connector
J3 J5 J6 = pinhead
J4 = connector; DIGIKEY: WM7647CT-ND; MFN: 874380343
J7 = connector; DESCRIPTION: USB-C (USB TYPE-C) USB 2.0 Receptacle Connector 24 (16+8 Dummy) Position Surface Mount, Right Angle; Through Hole; DIGIKEY: 2073-USB4110-GF-A-1-ND; MF: GCT; MPN: USB4110-GF-A; PACKAGE: None
L1 L2 = passives; MANUFACTURER: TAIYO YUDEN; MPN: NR3015T100M
L4 = ac; DIGIKEY: 732-5258-ND; MANUFACTURER: Würth Elektronik; MPN: 760308103204
L5 = passives; MANUFACTURER: Murata; MPN: DFE201210U-2R2M=P2
L6 = passives; MANUFACTURER: Taiyo Yuden; MPN: MCKK1608T1R0MN
L7 = Inductor; CATEGORY: Inductor; DESCRIPTION: FIXED IND 2.0NH0.1NH SMD; MANUFACTURER: Murata; MPN: LQG15HS2N0B02D; SUB-CATEGORY: Fixed; TOLERANCE: +/- 0.1 nH
L8 = Inductor; CATEGORY: Inductor; DESCRIPTION: FIXED IND 2.2NH0.1NH SMD; MANUFACTURER: Murata; MPN: LQG15HN2N2B02D; SUB-CATEGORY: Fixed; TOLERANCE: +/- 0.1 nH
LS1 = audio; DIGIKEY: 668-SMT-0440-T-2-RTR-ND; MPN: SMT-0440-T-2-R
Q1 = fets; DIGIKEY: 296-40008-1-ND; MANUFACTURER: TEXAS INSTRUMENTS; MPN: CSD75207W15
Q2 = fets; DIGIKEY: DMN2400UFB4-7DICT-ND
R1 = passives; MPN: ERJ-1GNF49R9C
R2 R3 = passives; MPN: RC0402JR-075R1L
R4 R5 = passives; MPN: RC0402JR-0715RL
R6 R7 = passives; DIGIKEY: RMCF0402FT97R6CT-ND; MPN: RMCF0402FT97R6
R8 R9 = passives; DIGIKEY: RMCF0402FT162RCT-ND; MPN: RMCF0402FT162R
R10 = passives; MPN: RC0402FR-072K2L; TOL: 1%
R11 = passives; MPN: RC0402FR-072K2L
R12 R13 = passives; DIGIKEY: RMCF0402FT5K10CT-ND; MPN: RMCF0402FT5K10
R14-R18 = passives; DIGIKEY: 311-10KJRCT-ND; MPN: RC0402JR-0710KL
R19 R20 = passives; MPN: RT0402BRE07100KL
R21 = passives; MPN: ERJ-1GNF2613C
R22 R23 = passives; MPN: ERJ-1GNF4023C
R24-R26 = passives; MPN: ERJ-1GNF8453C
R27 = passives; MPN: RMCF0402FT1M87; TOLERANCE: 1%
R28 = passives; DIGIKEY: RMCF0402FT5M10CT-ND; MPN: RMCF0402FT5M10; TOLERANCE: 1%
R29 R30 = passives; DIGIKEY: RMCF0402FT5M10CT-ND; MPN: RMCF0402FT5M10
RT1 = passives; DIGIKEY: 490-18149-1-ND; MPN: NCU15XH103F60RC
RX1-RX5 = passives
RZ1 = passives; MPN: RMCF0402ZT0R00; SUBSTITUE: Any
RZ2 RZ3 = passives; MPN: RMCF0603ZT0R00; SUBSTITUTE: ANY
S1 = Wurth_Switch_WS-SLSU; DATASHEET-URL: https://www.we-online.com/catalog/datasheet/450404015514.pdf; DIGIKEY: 732-13665-1-ND; IR: 300mA; PACKAGING: Tape and Reel; PART-NUMBER: 450404015514; QTY: 150; VR: 5V(DC)
S2 = switches; MANUFACTURER: Skyworks; MPN: SKY13373-460LF
S3 = switches; MANUFACTURER: Vishay; MPN: SIP32414DNP-T1-GE4
SJ1-SJ10 = SparkFun-Jumpers
TP0 TP1-TP15 = headers
U1 = Quorvo; DESCRIPTION: IC - SoC Cortex-M4 and BLE Radio with M0, 4.7x4.7mm 131-pin BGA; MANUFACTURER: Ambiq; MPN: AMA4B2KP-KBR
U2 = Quorvo; MANUFACTURER: Qorvo; MPN: DW3110
U3 = chips; DIGIKEY: 296-37142-1-ND; MPN: BQ24040DSQR
U4 = chips; DIGIKEY: 296-38885-1-ND; MPN: BQ51013BRHLR
U6 = Quorvo; DIGIKEY: 1888-BNO086; MANUFACTURER: CEVA Technologies, Inc.; MPN: BNO086
U7 = Quorvo; MANUFACTURER: Qorvo; MPN: QM14068
U8 = Quorvo; MANUFACTURER: Alliance Memory; MPN: AS5F18G04SND-10LIN
VR1 = regulators; MANUFACTURER: RichTek; MPN: RT8020GQW
VR2 VR3 = regulators; MPN: TPS7A0218PDQNR
VR4 = regulators; MPN: TPS7A0233PDQNR
VR5 = regulators; MPN: TPS7A0309PDBVR
X1 = crystals; C-LOAD: 6pF; FREQUENCY: 32 MHz; MANUFACTURER: Abracon; MAX-ESR: 80Ω; MPN: ABM12W-32.0000MHZ-6-D1X-T3
X2 X3 = crystals; C-LOAD: 7pF; FREQUENCY: 32.768 kHz; MANUFACTURER: TXC Corp; MPN: 9HT12-32.768KDZY-T
X4 = crystals; FREQ: 38.4 MHz; MANUFACTURER: TXC; MPN: 8Y38472012

## Nets
9DOF_CAP: C40.1 U6.9
9DOF_H_SDA/H_MISO/TX: RX4.2 SJ5.1 SJ6.2 U6.20
9DOF_SA0/H_MOSI: SJ5.2 SJ6.1 U6.17
9DOF_XI: C5.P$2 U6.27 X2.2
9DOF_XO: C6.P$2 U6.26 X2.1
!AD_EN: Q1.A1 Q1.C1 U4.8
+1V8: C10.P$2 C30.1 C35.1 C39.1 C53.P$1 C54.P$1 C55.P$1 C56.P$1 C71.P$2 C74.P$1 C77.1 C81.2 D1.A1 D1.A2 D2.A1 D2.A2 J1.1 J1.B1 J6.1 L2.P$1 R14.2 R15.2 R16.2 R25.1 RX3.2 RX4.1 RX5.1 S3.4 SJ2.1 SJ4.3 SJ8.1 TP9.P$1 U1.B1 U1.C4 U1.E11 U1.M9 U1.M10 U2.B13 U6.28 U8.8
+2V5: C9.P$1 C36.1 C38.1 C44.P$1 C47.P$1 C58.P$1 C78.2 C80.1 D4.CATHODE J5.1 L1.P$2 LS1.+ R24.2 S2.6 S3.1 U6.3 VR2.3 VR2.4 VR3.4
AGND [BLE_RF]: C1.2 C46.P$2 U1.M1 U1.M3
AP4_!RESET: C17.P$2 D3.1 J1.3 J1.B3 U1.A6
AP4_GP06/TT_FLASH_!HOLD_IO3: U1.J5 U8.7
AP4_GP08/TT_9DOF_H_SCL/SCK/RX: RX5.2 U1.H2 U6.19
AP4_GP09/TT_9DOF_H_MOSI: SJ5.3 U1.G2
AP4_GP10/TT_9DOF_H_MISO: SJ6.3 U1.G3
AP4_GP13/TT_9DOF_!BOOT: R14.1 U1.D5 U6.4
AP4_GP14/TT_!DW_SPI_CS: TP12.P$1 U1.D6 U2.B5
AP4_GP17/TT_9DOF_H_!INT: U1.D4 U6.14
AP4_GP18/TT_BATIN: C31.1 R27.2 R28.1 U1.D3
AP4_GP24/TT_RFSW_V1: S2.4 U1.E2
AP4_GP25/TT_RFSW_V2: S2.5 U1.K5
AP4_GP26/TT_DW_WAKEUP: U1.L5 U2.B9
AP4_GP27/TT_DW_IRQ: R19.2 U1.M5 U2.B1
AP4_GP30/TT_FLASH_!WP: U1.G4 U8.3
AP4_GP31/TT_DW_SPI_CLK: TP11.P$1 U1.E8 U2.A8
AP4_GP32/TT_DW_SPI_IO0: TP13.P$1 U1.E7 U2.B7
AP4_GP33/TT_DW_SPI_IO1: TP14.P$1 U1.E6 U2.A6
AP4_GP47/TT_FLASH_SCK: U1.F1 U8.6
AP4_GP48/TT_FLASH_PDI_IO0: U1.E1 U8.5
AP4_GP49/TT_FLASH_PDO_IO1: U1.D1 U8.2
AP4_GP50/TT_!DW_RESET: TP15.P$1 U1.A9 U2.A10
AP4_GP51/LED1_GREEN: R2.2 U1.B9
AP4_GP53/LED1_RED: R5.2 U1.C9
AP4_GP55/TT_BUZZER_GATE: Q2.G R20.1 U1.D9
AP4_GP58/TT_!CHG: U1.J7 U3.8 U4.7
AP4_GP60/TT_!PG: U1.K8 U3.5
AP4_GP63/TT_9DOF_PS0/WAKE: U1.M6 U6.6
AP4_GP65/TT_9DOF_!RESET: U1.A7 U6.11
AP4_GP66/TT_QI_TS_CTRL: C34.1 RT1.2 U1.A8 U4.13
AP4_GP69/TT_FLASH_!CS: RX3.1 U1.B8 U8.1
AP4_GP72/TT_9DOF_H_!CS: U1.C8 U6.18
AP4_GP78/VR-EN_USB0P9: U1.L11 VR5.3
AP4_GP79/LED2_RED: R4.2 U1.M11
AP4_GP80/USB_CABLE_DETECT: R23.2 R26.1 U1.K10
AP4_GP81/VR-EN_USB3P3: U1.L10 VR4.3
AP4_GP88/LED2_YLW: R3.2 U1.F9
AP4_LED2_BLUE_COMM: D1.C1 R5.1
AP4_LED_BLUE_COMM: D2.C2 R3.1
AP4_LED_GREEN_COMM: D2.C1 R4.1
AP4_LED_RED_COMM: D1.C2 R2.1
AP4_LPADC_VREF: C49.P$2 U1.A12
AP4_LPMICBIAS: C67.P$2 U1.B10
AP4_RFIOP1 [BLE_RF]: L7.1 U1.M2
AP4_SWDCLK: J1.4 J1.B4 U1.K3
AP4_SWDIO: J1.2 J1.B2 U1.J3
AP4_SWO: J1.6 J1.B6 U1.L4
AP4_USB0_N [USB_PHY]: D5.3 J7.A7 J7.B7 U1.M8
AP4_USB0_P [USB_PHY]: D5.2 J7.A6 J7.B6 U1.M7
AP4_VDDB_SUP: C72.P$1 C73.P$1 SJ8.2 U1.G1
AP4_VDDBH: C75.1 L6.2 RZ1.1 TP8.P$1 U1.G12
AP4_VDDBH_RF: C46.P$1 RZ1.2 U1.J1
AP4_VDDBH_SW: L6.1 U1.H12
AP4_VDDC: C63.P$1 U1.A3
AP4_VDDC_LV: C64.P$1 U1.B3
AP4_VDDF: C65.P$1 C71.P$1 TP10.P$1 U1.C2
AP4_VDDMIPI_1P8: C66.P$1 SJ7.1 U1.H10
AP4_VDDS: C62.P$1 U1.C1
AP4_VDDUSB_0P9: C69.P$1 SJ9.1 U1.L7
AP4_VDDUSB_3P3: C70.P$1 SJ10.1 U1.K7
AP4_XI: C8.1 U1.A4 X3.2
AP4_XI32M: CX2.1 U1.C12 X1.3
AP4_XO: C7.1 U1.A5 X3.1
AP4_XO32M: CX1.1 U1.D12 X1.1
BATT_THERM: J4.2 J4.2SUPP SJ1.3
BATT_TS: SJ1.2 U3.9
BLE_RFOUT [BLE_RF]: A4.S1 L8.2
BNO_ENV_SCL: R15.1 U6.15
BNO_ENV_SDA: R16.1 U6.16
BNO_PS1: SJ4.2 U6.5
BQ_AC1: C12.1 C13.1 C18.2 C20.1 C21.1 C22.1 C23.2 C42.2 U4.2
BQ_AC2: C12.2 C13.2 C19.2 C24.2 C43.2 L4.P$2 U4.19
BQ_BOOT1: C18.1 U4.3
BQ_BOOT2: C19.1 U4.17
BQ_CLAMP1: C42.1 U4.5
BQ_CLAMP2: C43.1 U4.16
BQ_COMM1: C23.1 U4.6
BQ_COMM2: C24.1 U4.15
BQ_FOD: R7.1 R9.2 R17.2 U4.14
BQ_ILM: R8.1 U4.12
BQ_ISET: R11.2 U3.2
BQ_RECT: C32.1 C83.1 C84.1 R18.1 U4.18
COIL_AC1: C20.2 C21.2 C22.2 L4.P$1
DW_EXTON: S3.2 S3.3 SJ2.2 VR3.3
DW_EXTON_RAW: SJ2.3 U2.A12
DW_GPIO4: TP4.P$1 U2.F1
DW_GPIO5: TP5.P$1 U2.D1
DW_GPIO6/EXTRXE: SJ3.3 TP6.P$1 U2.C4
DW_RF1 [UWB_RF]: C2.P$1 U2.H11
DW_RF1_BLKD: C2.P$2 U7.6
DW_RF2: R1.1 U2.H5
DW_RXLED: TP2.P$1 U2.E4
DW_RXOKLED: TP0.P$1 U2.C2
DW_SFDLED: TP1.P$1 U2.D3
DW_SYNC: TP7.P$1 U2.G2
DW_TXLED: TP3.P$1 U2.E2
DW_VDD2_PWROUT: C37.1 RZ2.1 S3.8
DW_VDD2_SUP: C15.P$1 C28.P$1 C86.P$1 FB1.P$1 RZ2.2 U2.B15
DW_VDD2A: C14.P$1 FB1.P$2 U2.F15
DW_VDD3_PWROUT: C29.1 RZ3.1 S3.5
DW_VDD3_SUP: C16.P$2 C26.P$2 C85.P$2 RZ3.2 U2.D15
DW_VIO_D: C27.1 U2.A4
DW_VTX_D: C41.P$2 U2.C14
DW_XT0 [UWB_XTAL]: C4.P$1 U2.G14 X4.3
DW_XTI [UWB_XTAL]: C3.P$1 U2.H15 X4.1
GND: C3.P$2 C4.P$2 C5.P$1 C6.P$1 C7.2 C8.2 C11.P$2 C14.P$2 C15.P$2 C16.P$1 C17.P$1 C25.P$2 C26.P$1 C27.2 C28.P$2 C29.2 C30.2 C31.2 C32.2 C33.2 C34.2 C35.2 C36.2 C37.2 C38.2 C39.2 C40.2 C41.P$1 C44.P$2 C45.P$2 C47.P$2 C48.P$2 C49.P$1 C50.P$2 C51.P$2 C52.P$2 C53.P$2 C54.P$2 C55.P$2 C56.P$2 C57.P$2 C58.P$2 C59.P$2 C60.P$1 C61.P$1 C62.P$2 C63.P$2 C64.P$2 C65.P$2 C66.P$2 C67.P$1 C68.P$2 C69.P$2 C70.P$2 C72.P$2 C73.P$2 C74.P$2 C75.2 C76.1 C77.2 C78.1 C79.2 C80.2 C81.1 C82.2 C83.2 C84.2 C85.P$1 C86.P$2 CX1.2 CX2.2 D3.2 D5.1 J1.5 J1.B5 J3.2 J4.1 J4.1SUPP J7.A1/B12 J7.B1/A12 J7.S1 J7.S2 J7.S3 J7.S4 Q2.S R1.2 R6.2 R10.1 R11.1 R12.2 R13.2 R19.1 R20.2 R21.1 R22.1 R23.1 R27.1 RX1.1 RX2.1 S2.2 S2.7 S2.8 S2.10 S2.12 S2.PAD S3.6 S3.7 S3.PAD SJ3.1 SJ4.1 SJ7.2 U1.B2 U1.B5 U1.B12 U1.D2 U1.E12 U1.H1 U1.J10 U1.L1 U1.L2 U1.L8 U2.A2 U2.A14 U2.B3 U2.B11 U2.C6 U2.C8 U2.C10 U2.C12 U2.D5 U2.D7 U2.D9 U2.D11 U2.D13 U2.E6 U2.E10 U2.E12 U2.E14 U2.F7 U2.F9 U2.G6 U2.G10 U2.H1 U2.H3 U2.H7 U2.H9 U2.H13 U3.3 U3.7 U3.PAD U4.1 U4.10 U4.11 U4.20 U4.PAD U6.2 U6.10 U6.25 U7.3 U7.4 U7.5 U7.7 U7.9 U8.4 VR1.3 VR1.9 VR1.13 VR2.2 VR2.PAD VR3.2 VR3.PAD VR4.2 VR4.PAD VR5.2 X1.2 X1.4 X4.2 X4.4
LNA_VCTRL: SJ3.2 U7.8
N$2: D4.ANODE LS1.- Q2.D
N$3 [BLE_RF]: C1.1 L7.2 L8.1
N$28: R6.1 R7.2
N$47: RX1.2 SJ1.1
N$49: RX2.2 U3.4
N$64: R17.1 R18.2
N$66: R8.2 R9.1
N$69: R10.2 RT1.1
RF1 [UWB_RF]: A1.FEED S2.9
RF2 [UWB_RF]: A2.FEED S2.3
RF3 [UWB_RF]: A3.FEED S2.1
RFC [UWB_RF]: S2.11 U7.2
SIMOBUCK_SW: L5.P$1 U1.A1
SIMOBUCK_SWSEL: L5.P$2 U1.A2
USB_CC1: J7.A5 R12.1
USB_CC2: J7.B5 R13.1
VBAT: C61.P$2 J3.1 J4.3 J4.3SUPP S1.2 U3.10
VBAT_SWITCHED: C51.P$1 C57.P$1 C76.2 C79.1 R28.2 R29.1 R30.1 S1.3 VR1.1 VR1.7 VR4.4 VR5.1
VDDAUDA_1P8-CLEAN: C48.P$1 C68.P$1 U1.B11 VR2.1
VDDUSB_0P9: C52.P$1 SJ9.2 VR5.5
VDDUSB_3P3: C50.P$1 SJ10.2 VR4.1
VQI: C33.1 C60.P$2 C82.1 Q1.A2 Q1.A3 Q1.B3 U3.1 U4.4
VR1_1P8_EN: R30.2 VR1.6
VR1_2P5_EN: R29.2 VR1.12
VR1_FB1: C10.P$1 R22.2 R25.2 VR1.4
VR1_FB2: C9.P$2 R21.2 R24.1 VR1.10
VR1_LX1: L2.P$2 VR1.8
VR1_LX2: L1.P$1 VR1.2
VR3_OUT: C11.P$1 C25.P$1 C45.P$1 U7.1 VR3.1
VUSB: C59.P$1 D5.4 J7.A4/B9 J7.B4/A9 Q1.B2 Q1.C2 Q1.C3 R26.2 U4.9

## Tracks (layer width: path | path; a pad name or v marks a point on that pad's centre or on a via)
9DOF_CAP
  Top 0.152: C40.1 59.77,12.72 60.59,12.72 61.23,12.08 U6.9
9DOF_H_SDA/H_MISO/TX  (via drill 0.2)
  Top 0.152: v63.13,10.21 64.04,10.21 64.37,9.88 64.37,9.24 64.54,9.08 U6.20 65.14,9.08 65.67,9.6 v65.67,10.41
  Bottom 0.152: SJ6.2 62.31,10.41 62.52,10.21 v63.13,10.21 | v65.67,10.41 66.58,10.41 | SJ5.1 67.19,9.8 66.58,10.41 | RX4.2 66.58,10.41
9DOF_SA0/H_MOSI  (via drill 0.2)
  Top 0.152: U6.17 62.98,9.71 v63.05,9.78
  Bottom 0.152: v63.05,9.78 63.05,9.4 | SJ5.2 66.17,9.19 65.56,8.59 63.84,8.59 63.1,9.32 63.1,9.4 63.05,9.4 | SJ6.1 63.05,9.4
9DOF_XI
  Top 0.152: C5.P$2 66.96,13.76 66.68,13.48 X2.2 66.48,12.98 66.09,12.59 64.8,12.59 U6.27
9DOF_XO
  Top 0.152: C6.P$2 66.41,11.33 66.68,11.6 X2.1 66.17,11.92 66,12.09 64.8,12.09 U6.26
!AD_EN
  Top 0.152: 35.74,9.42 38.11,9.42 38.35,9.17 38.35,7.47 38,7.11 U4.8 | 35.74,9.42 Q1.A1 | Q1.C1 34.74,8.75 35.41,9.42 35.74,9.42
+1V8  (via drill 0.1, 0.2)
  Top 0.127: U1.M9 50.06,28.74 49.9,28.9 | U1.B1 52.96,24.99 52.97,25.01 53.04,24.94 53.09,24.94 | U1.M10 49.71,28.7 49.51,28.9
  Top 0.152: C55.P$1 48.95,29.85 | 48.95,29.85 48.78,30.02 v48.67,30.02 48.37,30.02 C54.P$1 48.39,29.65 48.77,29.65 49.51,28.92 49.51,28.9 | R14.2 59.04,10.36 57.08,12.32 v56.62,12.32 | R16.2 57.97,13.46 v57.23,13.46 | C30.1 25.15,22.96 v24.92,22.96 | 49.9,28.9 48.95,29.85 | R15.2 58.73,11.53 v58.43,11.84 | J6.1 8.26,23.93 C77.1 | C35.1 65.46,14.61 v65.46,14.07 65.46,13.36 65.18,13.08 U6.28 | J1.1 49.92,16.97 v49.23,16.97
  Top 0.203: R25.1 10.81,32.81 C10.P$2 10.7,33.88 9.99,33.88 9.79,33.68 v9.79,33.22 | C81.2 20.82,27.34 v21.16,27 | C81.2 19.24,27.34 v18.93,27.03 | v48.28,26.21 48.23,26.26 47.86,26.26 C74.P$1 47.45,25.86 47.02,25.86 46.82,25.65 v46.67,25.65 | 53.09,24.94 53.47,24.56 53.98,24.56 C71.P$2 54.27,24.59 v54.59,24.59 54.88,24.59 C53.P$1 55.03,24.69 55.6,24.12 TP9.P$1 | C39.1 46.2,18.09 v45.95,18.34 | v53.04,21.39 53.04,22.3 C56.P$1 52.63,22.78 53.04,23.19 v53.04,23.34 | S3.4 21.41,28.36 20.39,27.34 C81.2 | D2.A1 D2.A2 D1.A1 64.07,33.67 63.67,33.27 v63.23,33.27 63.5,33.27 63.9,32.88 D1.A2 | SJ8.1 56.55,21.79 v56.44,21.89
  Top 0.305: v25.23,27.08 25.2,27.05 25.2,23.83 C30.1 | U8.8 45.89,17.9 C39.1 | J6.1 10.09,23.32 v11.82,23.32 | v55.51,18.57 55.51,15.8 56.42,14.88 v56.93,14.88
  Top 1.27: J6.1 9.48,23.83
  Route2 0.152: v54.59,24.59 54.66,24.54
  Route2 0.203: v48.28,26.21 v48.29,26.22 49.16,26.22 49.23,26.14 U1.E11 | v54.59,24.59 54.64,24.54 v54.64,24.28
  Route2 0.305: 54.66,24.54 55,24.54 55.86,23.67 55.86,22.25 56.22,21.89 v56.44,21.89
  Route15 0.152: v63.73,11.84 63.73,12.14 | v61.19,14.68 61.19,12.14
  Route15 0.203: v46.67,25.65 45.99,24.98 | v13.95,23.83 14.1,23.98 14.1,26.84 11.41,29.53 v11.41,30.43
  Route15 0.305: 44.94,20.37 47.05,22.48 47.05,23.93 45.99,24.98 45.65,25.32 45.65,27.08 46.46,27.89 v46.46,30.63 | v45.95,18.34 46.46,18.85 49.21,18.85 | 49.21,18.85 49.23,18.82 v49.23,16.97 | v52.25,17.32 52.25,18.14 | 52.25,18.14 52.25,18.54 51.64,19.15 49.51,19.15 49.21,18.85 | 52.25,18.14 52.86,17.53 54.79,17.53 55.4,18.14 55.4,18.47 55.3,18.57 | 55.3,18.57 v55.51,18.57 56.67,18.57 57.84,19.74 57.84,20.5 v56.44,21.89 | v53.04,21.39 53.17,21.39 53.88,20.68 53.88,19.99 55.3,18.57 | v57.23,13.46 56.93,13.77 v56.93,14.88 56.01,13.97 56.01,12.93 v56.62,12.32 57.94,12.32 v58.43,11.84 58.73,12.14 61.19,12.14 63.73,12.14 64.75,12.14 65.46,12.85 v65.46,14.07 | v46.46,34.14 50.88,34.14 51.7,34.95 58.6,34.95 60.28,33.27 v63.23,33.27
  Route15 0.457: v45.95,18.34 44.94,19.35 44.94,20.37 44.89,20.37 44.13,21.13 32.8,21.13 32.54,21.39 32.54,25.96 31.93,26.57 28.91,26.57 28.5,26.97 25.33,26.97 v25.23,27.08 25.13,26.97 21.19,26.97 v21.16,27 21.14,26.97 18.98,26.97 v18.93,27.03 18.88,26.97 17.61,26.97 14.46,23.83 v13.95,23.83 13.44,23.32 v13.24,23.32 12.73,23.83 v12.53,23.83 12.02,23.32 v11.82,23.32
  Bottom 0.152: SJ2.1 20.66,27.51 v21.16,27 | v24.92,22.96 24.92,22 22.94,20.02 U2.B13 | RX3.2 38.78,19.46 v39.25,19.46 | RX4.1 66.13,13.4 v65.46,14.07 | SJ4.3 61.5,14.38 v61.19,14.68 | RX5.1 63.73,11.94 v63.73,11.84
  Bottom 0.203: v9.79,33.22 9.79,31.95 11.31,30.43 v11.41,30.43 | U1.C4 51.81,24.84 52.71,23.93 | 52.71,23.93 | v52.25,17.32 52.25,16.81 52.03,16.59 J1.B1 | v53.04,23.34 53.04,23.6 52.71,23.93
  Bottom 0.305: v48.67,30.02 47.96,30.02 47.86,30.13 46.95,30.13 46.46,30.61 v46.46,30.63 v46.46,34.14
  other vias: 51.81,25.45 49.36,26.14 22.57,20.02
  pour Top (isolate 0.102, no thermals): 9.74,24.61 10.67,24.61 10.67,27.13 9.97,27.13 9.89,27.12 9.82,27.09 9.77,27.05 9.72,26.99 9.59,26.77 9.49,26.52 9.43,26.27 9.41,26.02 9.41,26.02 9.4,26 9.4,25.98 9.4,25.98 9.39,25.89 9.39,25.88 9.39,25.87 9.39,25.86 9.38,25.85 9.35,25.76 9.35,25.75 9.35,25.74 9.34,25.73 9.34,25.72 9.29,25.63 9.29,25.63 9.28,25.62 9.28,25.61 9.27,25.6 9.21,25.53 9.21,25.52 9.2,25.51 9.19,25.5 9.19,25.5 9.16,25.47 9.15,25.45 9.14,25.45 9.14,25.45 9.13,25.44 9.08,25.41 9.07,25.41 9.07,25.4 9.06,25.4 9.05,25.4 9,25.38 8.99,25.38 8.98,25.38 8.97,25.38 8.96,25.38 8.92,25.38 8.92,25.37 8.9,25.37 8.88,25.37 8.88,25.37 7.6,25.37 7.6,24.74 8.88,24.74 8.88,24.74 8.9,24.74 8.92,24.74 8.92,24.74 9.07,24.73 9.08,24.73 9.09,24.73 9.1,24.73 9.11,24.72 9.25,24.69 9.25,24.69 9.27,24.69 9.29,24.68 9.29,24.68 9.51,24.63
  pour Route15 (rank 2): 60.43,36.98 47.5,36.98 37.75,27.23 34.86,27.23 34.86,11.79 55.73,11.79 55.74,11.79 55.75,11.79 55.76,11.79 55.77,11.78 62.3,8.13 67.98,8.13 67.98,15.33 67.3,15.98 63.34,15.98 63.33,15.98 63.32,15.98 63.3,15.98 63.29,15.98 62.86,16 62.86,16 62.84,16 62.83,16 62.82,16 62.4,16.09 62.4,16.09 62.38,16.09 62.36,16.09 62.36,16.1 61.95,16.24 61.95,16.24 61.93,16.25 61.92,16.25 61.92,16.26 61.53,16.46 61.53,16.46 61.52,16.47 61.5,16.47 61.5,16.48 61.15,16.73 61.14,16.73 61.13,16.74 61.12,16.75 61.12,16.75 60.81,17.05 60.8,17.05 60.79,17.07 60.78,17.08 60.78,17.08 60.51,17.42 60.51,17.42 60.5,17.44 60.49,17.45 60.49,17.46 60.28,17.83 60.27,17.83 60.27,17.85 60.26,17.86 60.26,17.87 60.1,18.27 60.1,18.27 60.09,18.29 60.09,18.3 60.09,18.31 59.99,18.73 59.98,18.73 59.98,18.75 59.98,18.76 59.98,18.77 59.94,19.2 59.94,19.2 59.94,19.22 59.94,19.24 59.94,19.24 59.95,20.53 59.95,20.53 59.95,20.55 59.96,20.57 59.96,20.57 59.99,21.03 59.99,21.03 59.99,21.05 59.99,21.06 59.99,21.07 60.09,21.51 60.09,21.52 60.1,21.53 60.1,21.55 60.1,21.55 60.26,21.98 60.26,21.98 60.27,22 60.28,22.01 60.28,22.01 60.5,22.41 60.5,22.42 60.51,22.43 60.51,22.45 60.52,22.45 60.79,22.81 60.79,22.82 60.8,22.83 60.81,22.84 60.82,22.84 61.14,23.16 61.14,23.17 61.15,23.18 61.17,23.19 61.17,23.19 61.53,23.46 61.54,23.47 61.55,23.48 61.57,23.49 61.57,23.49 61.97,23.7 61.97,23.71 61.99,23.71 62,23.72 62.01,23.72 62.43,23.88 62.43,23.88 62.45,23.89 62.47,23.89 62.47,23.89 62.92,23.99 62.92,23.99 62.94,23.99 62.95,24 62.96,23.99 63.41,24.03 63.41,24.03 63.43,24.03 63.45,24.03 63.45,24.03 67.09,24.03 67.26,24.04 67.44,24.09 67.6,24.16 67.74,24.27 67.87,24.39 67.97,24.54 68.04,24.7 68.09,24.87 68.1,25.04 68.1,32.31 60.46,32.31 60.43,32.34
  pour Top (isolate 0.102, no thermals): 14.15,24.12 9.07,24.12 8.86,24.33 8.86,25.03 7.56,25.03 7.56,23.73 8.27,23.03 14.15,23.03 14.34,23.22 14.34,23.92
  pour Route15 (rank 2): 29.45,30.28 20.37,30.28 14.28,24.18 11.84,24.18 11.56,23.91 11.56,23.24 11.84,22.96 14.13,22.96 17.99,26.82 29.45,26.82
+2V5  (via drill 0.2)
  Top 0.152: C36.1 63.48,14.36 U6.3 | VR3.4 C44.P$1 19.37,25.38 v19.34,25.35 | 19.01,28.82 19.04,28.82 v19.16,28.7 | VR2.4 44.43,23.91 44.43,24.15 VR2.3
  Top 0.203: C9.P$1 16.47,26.92 R24.2 | S2.6 36.14,13.99 36.14,14.72 C38.1 35.9,15.16 36.71,15.98 40.47,15.98 40.75,16.25 | 20.25,31.85 C80.1 21.02,30.92 21.31,30.64 21.31,30.37 S3.1 | VR2.4 44.48,23.55 44.48,22.93 C47.P$1 44.63,22.81 v44.99,23.16 | v64.95,35 64.85,34.9 64.85,33.38 65.27,32.96 D4.CATHODE 66.15,32.94 66.28,33.07 66.85,33.07 C58.P$1 | 21.54,35 J5.1 | v40.06,29.11 40.06,23.93 v40.75,23.24 40.75,16.25 | C36.1 62.24,15.6 56.9,15.6 v56.83,15.67 | 40.75,16.25 40.75,14.2 v40.77,14.17
  Top 0.305: C9.P$1 17.09,26.9 19.01,28.82 19.01,29.93 20.25,31.17 20.25,31.85 20.25,32.64 19.95,32.94 19.95,35 J5.1
  Top 0.813: J5.1 21.16,34.8
  Route15 0.203: v56.83,15.67 56.34,15.19 54.19,15.19 53.78,14.78 47.58,14.78 46.95,14.15 v46.87,14.15
  Route15 0.305: v40.06,29.11 40.16,29.21 40.16,29.31 45.5,34.65 50.81,34.65 51.62,35.46 58.91,35.46 v59.24,35.13
  Route15 0.457: J5.1 21.37,34.9 22.99,34.9 30.26,27.64 38.56,27.64 40.03,29.11 v40.06,29.11
  Bottom 0.152: v19.16,28.7 19.34,28.52 v19.34,25.35
  Bottom 0.203: v64.95,35 64.24,34.29 LS1.+ 63.84,34.21 62.92,35.13 v59.24,35.13 | v46.87,14.15 40.8,14.15 v40.77,14.17 | v44.99,23.16 44.91,23.24 v40.75,23.24
  pour Top (isolate 0.102, no thermals): 19.89,35.92 19.6,35.63 19.56,35.61 17.96,35.61 17.95,35.61 17.94,35.61 17.92,35.61 17.92,35.61 17.36,35.64 17.36,35.64 16.82,35.66 16.11,35.66 16.11,33.12 16.84,33.12 16.91,33.13 16.96,33.14 17.01,33.17 17.05,33.21 17.15,33.37 17.22,33.54 17.26,33.72 17.28,33.9 17.28,33.9 17.28,33.92 17.28,33.94 17.28,33.94 17.3,34.14 17.3,34.15 17.3,34.16 17.3,34.17 17.31,34.18 17.36,34.39 17.36,34.4 17.37,34.41 17.37,34.42 17.38,34.43 17.47,34.62 17.48,34.63 17.48,34.64 17.49,34.65 17.49,34.65 17.62,34.83 17.63,34.83 17.64,34.84 17.64,34.85 17.65,34.85 17.68,34.88 17.69,34.89 17.7,34.9 17.71,34.9 17.72,34.91 17.76,34.93 17.76,34.94 17.77,34.94 17.78,34.95 17.79,34.95 17.83,34.96 17.84,34.97 17.85,34.97 17.86,34.97 17.87,34.97 17.91,34.97 17.92,34.98 17.93,34.98 17.95,34.98 17.95,34.98 19.52,35 19.52,35 19.54,35 19.56,35 19.56,35 19.56,35 19.58,34.99 19.6,34.98 19.6,34.98 19.6,34.98 19.61,34.97 19.63,34.95 19.63,34.95 20.4,34.19 22.14,34.19 22.79,34.84 22.79,35.16 22.04,35.92
  pour Route15 (isolate 0.102, no thermals): 20.26,34.2 22.07,34.2 22.78,34.9 22.78,35.3 22.07,36 19.85,36 19.55,35.71 19.55,34.9
AGND  (via drill 0.1, 0.2)
  Top 0.127: U1.M1 52.86,28.26 | U1.M3 52.15,28.8
  Top 0.178: 52.15,28.8 51.9,29.06
  Top 0.203: U1.M1 52.94,28.67
  Top 0.22: C46.P$2 v54.87,29.51 | 52.94,28.67 52.94,29.48 v53.07,29.62 | 51.9,29.06 v51.9,29.73 v51.89,29.74 v51.9,29.74 v51.9,31.8 v51.89,31.81 v51.89,33.04 v51.89,34.39 v53.98,34.39 v55.93,34.39
  Route2 0.127: U1.M1 52.86,28.26
  Route2 0.229: U1.M3 U1.M1 53.47,28.59 53.47,28.6
  other vias: 58.58,24.23 58.58,25.22 58.58,28.3 58.58,29.69 58.58,31.75 59.77,32.05 60.99,32.05 62.21,32.05 63.43,32.05 64.65,32.05 66.48,32.05 57.03,26.42 57.48,31.21 52.86,28.59 52.16,28.59 55,32.66 56.9,32.69 55.63,33.71 55.78,31.95 56.22,31.01 54.01,31.45 53.73,30.07 53.98,32.96 56.32,29.69 57.48,29.69 57.48,28.27 56.32,28.27
  pour Top (rank 2): 56.38,27.96 56.39,27.93 56.39,26.09 58.38,24.1 67.06,24.1 68.03,25.08 68.03,32.23 67.97,32.28 58.34,32.28 58.31,32.3 55.98,34.62 51.88,34.62 51.72,34.46 51.72,29.55 52.06,29.2 52.08,29.17 52.08,28.58 52.13,28.52 53.44,28.52 53.47,28.51 53.71,28.27 56.05,28.27 56.08,28.26
  pour Route2 (rank 2): 56.38,27.96 56.39,27.93 56.39,26.09 58.38,24.1 67.06,24.1 68.03,25.08 68.03,32.23 67.97,32.28 58.34,32.28 58.31,32.3 55.98,34.62 51.88,34.62 51.72,34.46 51.72,29.55 52.06,29.2 52.08,29.17 52.08,28.58 52.13,28.52 53.44,28.52 53.47,28.51 53.71,28.27 56.05,28.27 56.08,28.26
AP4_!RESET  (via drill 0.2)
  Top 0.127: U1.A6 51.11,24.44
  Top 0.152: 51.11,24.44 50.5,23.83 49.82,23.83 49.54,23.55 49.54,21.69 49.08,21.23 48.47,21.23 47.8,20.56 C17.P$2 47.18,20.86 D3.1 46.77,20.35 46.77,18.72 47.58,17.91 47.58,14.27 v46.87,13.56 | v48.8,14.38 49.74,15.32 J1.3
  Bottom 0.152: v46.87,13.56 47.99,13.56 v48.8,14.38 48.8,14.88 49.92,16 50.68,16 51.36,15.32 J1.B3
AP4_GP06/TT_FLASH_!HOLD_IO3  (via drill 0.1, 0.2)
  Top 0.152: v41.99,27.51 42.09,27.41 42.09,23.42 43.44,22.07 43.44,16.64 v43.41,16.61 | v44.23,16.61 44.25,16.63 U8.7
  Route15 0.152: v47.86,27.1 48.88,27.1 49.51,26.47 50.58,26.47 50.98,26.87 51.14,26.87 51.46,27.19 U1.J5
  Bottom 0.152: v47.86,27.1 47.2,27.76 42.25,27.76 v41.99,27.51 | v43.41,16.61 v44.23,16.61
  other vias: 51.46,27.54
AP4_GP08/TT_9DOF_H_SCL/SCK/RX  (via drill 0.1, 0.2)
  Top 0.152: v63.96,9.78 63.98,9.77 U6.19
  Bottom 0.152: U1.H2 54.57,27.19 56.55,25.22 56.55,24.67 57.08,24.14 57.08,22.91 58.63,21.36 58.63,17.48 58.07,16.92 58.07,15.57 61.3,12.34 62.31,12.34 63.51,11.15 63.96,11.15 | v63.96,9.78 63.96,11.15 | RX5.2 63.96,11.15
  other vias: 52.51,27.2
AP4_GP09/TT_9DOF_H_MOSI  (via drill 0.1, 0.2)
  Top 0.152: v57.46,18.19 58.33,17.32 58.33,16.16 v58.43,16.05
  Bottom 0.152: 65.16,9.83 SJ5.3 65.16,11.53 63.53,13.16 63.33,13.16 62.82,12.65 61.5,12.65 58.43,15.72 v58.43,16.05 | U1.G2 53.43,26.84 55.91,24.36 55.91,21.89 56.32,21.49 56.72,21.49 57.61,20.6 57.61,18.34 v57.46,18.19
  other vias: 52.51,26.84
AP4_GP10/TT_9DOF_H_MISO  (via drill 0.1, 0.2)
  Top 0.152: v57.03,18.11 57.21,17.93 57.21,16.18 v57.26,16.13
  Bottom 0.152: U1.G3 52.16,26.74 52.44,26.47 53.42,26.47 55.61,24.28 55.61,21.69 56.06,21.23 56.6,21.23 57.35,20.48 57.35,18.73 57.03,18.41 v57.03,18.11 | v57.26,16.13 57.26,15.44 61.27,11.43 SJ6.3
  other vias: 52.16,26.84
AP4_GP13/TT_9DOF_!BOOT  (via drill 0.1, 0.2)
  Top 0.152: v56.72,13.26 56.72,13.04 58.69,11.07 59.34,11.07 R14.1 60.77,9.65 60.77,9.25 61.27,8.74 62.04,8.74 62.16,8.86 62.16,9.95 62.98,10.77 U6.4 | v55.66,14.78 55.15,15.29 55.15,18.69 54.72,19.13 53.4,19.13 52.81,19.71 52.51,19.71 52.3,19.91 v52.3,20.12
  Route2 0.152: U1.D5 51.46,25.7 51.11,25.35 51.11,24.82 51.72,24.21 v51.72,23.72
  Bottom 0.152: v56.72,13.26 56.72,14.07 56.42,14.38 56.06,14.38 v55.66,14.78 | v51.72,23.72 51.82,23.62 51.82,21.06 52.3,20.57 v52.3,20.12
  other vias: 51.46,25.79
AP4_GP14/TT_!DW_SPI_CS  (via drill 0.1, 0.2)
  Top 0.152: v41.74,25.17 41.81,25.1 41.81,23.32 43.08,22.05 v43.08,18.8
  Bottom 0.152: U2.B5 20.97,20.2 20.36,20.81 20.36,23.64 21.79,25.07 26.85,25.07 27.23,25.45 41.36,25.45 41.64,25.17 v41.74,25.17 | U1.D6 51.14,25.77 51.14,24.9 51.19,24.84 51.19,21.82 50.81,21.44 50.81,20.25 49.25,18.69 43.21,18.69 43.11,18.8 v43.08,18.8 42.53,19.35 TP12.P$1
  other vias: 20.97,20.02 51.11,25.79
AP4_GP17/TT_9DOF_H_!INT  (via drill 0.1, 0.2)
  Top 0.152: U6.14 61.58,9.58 60.84,10.32 60.84,11.69 60.37,12.16 59.04,12.16 58.7,12.5 58.7,13.73 58.59,13.83 55.54,13.83 54.64,14.73 54.64,18.19 54.31,18.52 v53.55,18.52
  Route2 0.152: U1.D4 51.81,25.89 52.38,26.47 53.3,26.47 53.58,26.19 53.58,25.3 v53.4,25.12
  Bottom 0.152: v53.4,25.12 53.47,25.2 53.78,25.2 53.96,25.02 53.96,23.8 53.55,23.39 v53.55,18.52
  other vias: 51.81,25.79
AP4_GP18/TT_BATIN  (via drill 0.1, 0.2)
  Top 0.152: R28.1 R27.2 35.77,21.62 36.23,21.16 36.23,18.85 C31.1 36.5,17.3 v38.51,17.3 | v54.59,21.77 54.52,21.77 54.13,21.39 53.58,21.39 52.66,20.47 51.95,20.47 51.57,20.09 v51.57,19.76
  Route15 0.152: U1.D3 52.16,26.24 52.43,26.52 52.63,26.52 53.6,27.48 53.83,27.48 54.9,26.42 54.9,25.51 55.15,25.25 55.15,21.95 54.97,21.77 v54.59,21.77
  Bottom 0.152: v38.51,17.3 38.61,17.4 49.08,17.4 51.44,19.76 v51.57,19.76
  other vias: 52.16,25.79
AP4_GP24/TT_RFSW_V1  (via drill 0.1, 0.2)
  Top 0.152: v54.29,18.01 53.88,17.6 53.88,14.58 v54.08,14.38 | v42.91,12.34 42.81,12.25 S2.4
  Route15 0.152: U1.E2 52.64,26.14 52.97,26.47 53.58,26.47 54.24,25.81 54.24,23.22 54.79,22.66 v54.79,22.15 | v54.08,14.38 53.98,14.48 49.51,14.48 v48.7,13.67
  Bottom 0.152: v54.29,18.01 54.21,18.08 54.21,21.92 54.44,22.15 v54.79,22.15 | v48.7,13.67 48.7,13.16 47.99,12.45 43.01,12.45 v42.91,12.34
  other vias: 52.51,26.14
AP4_GP25/TT_RFSW_V2  (via drill 0.1, 0.2)
  Top 0.152: S2.5 42.91,12.75 43.82,13.67 43.82,28.53 47.91,32.61 48.77,32.61 v48.88,32.51
  Route15 0.152: U1.K5 51.36,27.89 51.11,28.14 51.11,28.35 49.71,29.74 49.71,31.8 49,32.51 v48.88,32.51
  other vias: 51.46,27.89
AP4_GP26/TT_DW_WAKEUP  (via drill 0.1, 0.2)
  Top 0.152: v50.35,32.6 50.15,32.6 49.88,32.87 47.77,32.87 43.57,28.66 43.57,24.13 v43.47,24.03
  Route15 0.152: U1.L5 51.46,28.59 49.97,30.08 49.97,32.22 v50.35,32.6
  Bottom 0.152: v43.47,24.03 43.44,24 40.95,24 40.37,24.59 27.74,24.59 27.46,24.31 23.7,24.31 21.47,22.07 21.47,20.96 21.77,20.66 U2.B9
  other vias: 51.46,28.24 21.77,20.02
AP4_GP27/TT_DW_IRQ  (via drill 0.2)
  Top 0.127: U1.M5 51.46,29.05
  Top 0.152: 51.46,29.05 v51.49,29.08 | v50.09,33.2 47.74,33.2 43.31,28.77 43.31,25.37 v43.21,25.27 | U2.B1 20.17,20.09 19.74,20.52 19.74,21.87 19.13,22.48 v19.13,22.61 | R19.2 41.74,25.96 v41.74,25.65
  Route15 0.152: v51.49,29.08 51.49,30.35 50.73,31.12 50.73,32.77 50.3,33.2 v50.09,33.2
  Bottom 0.152: v19.13,22.61 19.13,22.81 21.67,25.35 26.75,25.35 27.11,25.7 41.69,25.7 v41.74,25.65 42.91,25.65 43.21,25.35 v43.21,25.27
AP4_GP30/TT_FLASH_!WP  (via drill 0.1, 0.2)
  Top 0.152: v38.34,15.29 37.45,15.29 U8.3
  Route15 0.152: U1.G4 51.81,28.69 52.03,28.91 55.2,28.91 55.43,28.68 55.43,27.03 55.71,26.75 55.71,25.77 55.91,25.57 55.91,22.83 v56.4,22.35 | v56.06,16.05 55.56,15.54 47.12,15.54 v46.87,15.29
  Bottom 0.152: v56.4,22.35 56.53,22.35 57.87,21.01 57.87,17.88 57.64,17.65 56.85,17.65 56.06,16.87 v56.06,16.05 | v46.87,15.29 46.46,14.88 40.16,14.88 39.76,15.29 v38.34,15.29
  other vias: 51.81,26.84
AP4_GP31/TT_DW_SPI_CLK  (via drill 0.1, 0.2)
  Top 0.127: U1.E8 50.41,26.25 50.68,26.52 50.68,27.08 50.65,27.1 50.65,27.2 v50.6,27.25
  Top 0.152: U2.A8 21.57,20.88 v21.88,21.18 | v45.24,28.98 44.18,27.91 v44.18,22.5
  Bottom 0.152: v21.88,21.18 22.36,21.67 22.36,22.55 23.86,24.05 29.37,24.05 29.8,23.62 39.81,23.62 40.62,22.8 42.45,22.8 43.21,22.04 TP11.P$1 43.57,22 44.08,22.5 v44.18,22.5 | v50.6,27.25 50.6,27.3 51.11,27.81 51.11,28.57 50.76,28.93 45.3,28.93 v45.24,28.98
AP4_GP32/TT_DW_SPI_IO0  (via drill 0.1, 0.2)
  Top 0.127: U1.E7 50.76,26.25 51.08,26.57 v51.34,26.57
  Top 0.152: v41.45,24.71 41.56,24.61 41.56,23.14 42.7,22 42.7,18.14 v42.81,18.03
  Route15 0.152: v51.34,26.57 51.09,26.57 50.78,26.26 50.78,25.58 51.03,25.32 51.03,21.89 51.8,21.13 51.8,20.78 51.52,20.5 v51.42,20.5